# Altium PCB MDES_V3.PcbDoc (part 2 of 2)
Units mil, origin at the board's own origin, x right, y up, seen from the top; angles counter-clockwise.
Board outline 6000 x 4000 mil, 6 copper layers (Component Side, Ground Plane (GND), Inner Layer 1, Inner Layer 2, Power Plane (VCC), Solder Side), stack 51.068 mil thick; 209 components, 153 nets, 733 pads, 136 vias.
Unrouted connection lines stored in the file: 303.
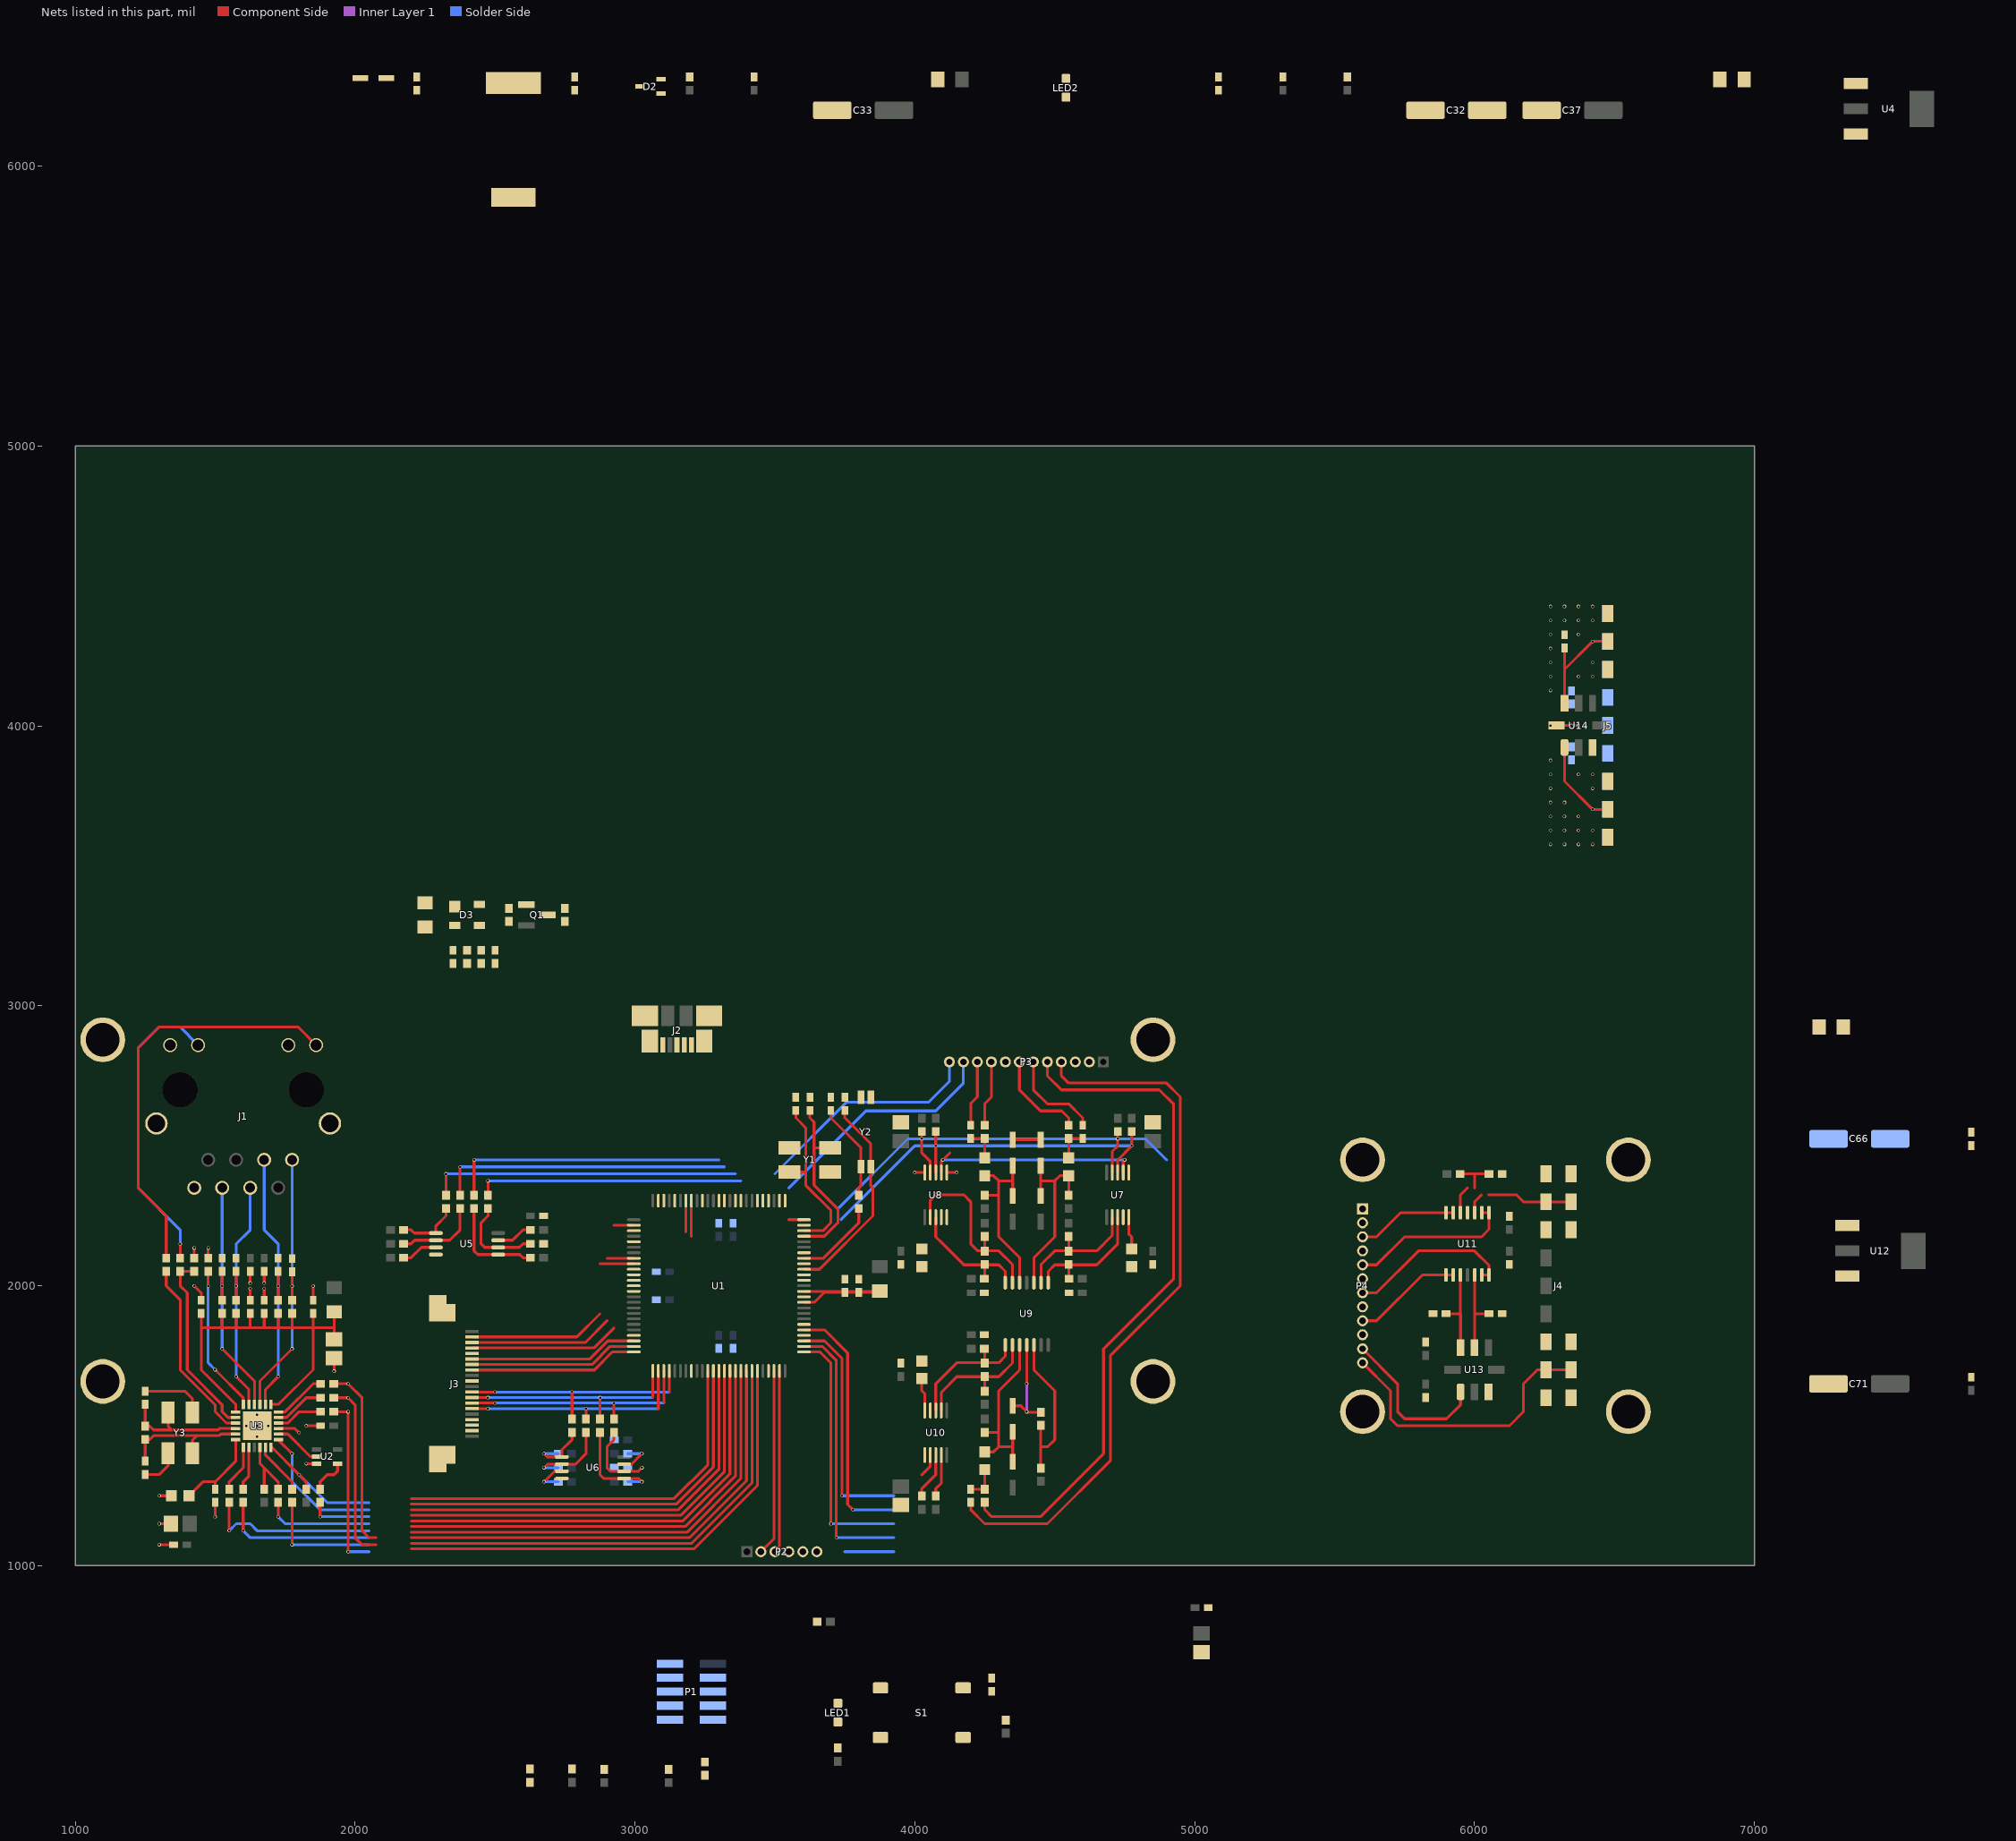
[diagram p5: the nets of this part, all layers, seen from the top]

## Via types
v1: diameter 12, hole 8, Component Side to Solder Side, tented both sides, 98 vias
v2: diameter 12, hole 8, Component Side to Solder Side, 33 vias
v3: diameter 19.68, hole 7.87, Component Side to Solder Side, 5 vias

## Nets (pads, with @x,y where several pads share a name; then routed paths per layer and width w, separated by ;. In a path a pad name is that pad's centre, name@x,y a point inside that pad or via, vN(x,y) a via of type N, cw(c..) or ccw(c..) an arc to the next point about the centre after c; other vN are vias at no path point) (continued)
AGND: C65.2 C66.2 C67.2 C68.2 C69.2 C70.2 C71.2 C72.2 C74.2 C76.2 H5.0 H6.0 H7.0 H8.0 J4.1 J4.3 J4.4 J4.6 J4.7 J4.9 J4.13 J4.15 P4.2 P4.4 P4.6 P4.8 P4.10 R79.2 U11.11 U12.1 U13.3
AI_0: P3.9 R60.1 | length 236.2
  Component Side w10: R60.1@4250,2573.62 4250,2650 4273.62,2673.62 P3.9@4273.62,2800
AI_1: P3.7 R59.1 | length 344.2
  Component Side w10: P3.7@4373.62,2800 4373.62,2700 4448.62,2625 4525,2625 4550,2600 R59.1@4550,2573.62
AI_2: P3.5 R71.1 | length 2449.7
  Component Side w10: R71.1@4250,1226.38 4250,1200 4275,1175 4448.62,1175 4674.31,1400.69 4674.31,1774.31 4925,2025 4925,2648.62 4873.62,2700 4523.62,2700 4473.62,2750 P3.5@4473.62,2800
AI_3: P3.3
AOUT: U1.6
B_5V_S: C73.1 C75.1 J5.10 J5.11 J5.12 U14.8 | length 100
  Component Side w10: v1(6271.81,4002.13) v1(6371.81,4002.13)
  other v1: 6346.81,4002.13
B_AGND: C73.2 C75.2 C77.2 J5.1 J5.3 J5.4 J5.6 J5.7 J5.9 J5.13 J5.15 U14.3
  other v1: 6271.81,3577.13 6321.81,3577.13 6371.81,3577.13 6421.81,3577.13 6271.81,3627.13 6321.81,3627.13 6371.81,3627.13 6421.81,3627.13 6271.81,3677.13 6321.81,3677.13 6371.81,3677.13 6271.81,3727.13 6321.81,3727.13 6271.81,3777.13 6421.81,3777.13 6271.81,3827.13 6371.81,3827.13 6421.81,3827.13 6271.81,3877.13 6271.81,4127.13 6271.81,4177.13 6371.81,4177.13 6421.81,4177.13 6271.81,4227.13 6421.81,4227.13 6271.81,4277.13 6271.81,4327.13 6371.81,4327.13 6271.81,4377.13 6321.81,4377.13 6371.81,4377.13 6421.81,4377.13 6271.81,4427.13 6321.81,4427.13 6371.81,4427.13 6421.81,4427.13
B_Z_OUT: C77.1 J5.5 J5.8 U14.7 | length 449.1
  Component Side w10: U14.7@6321.81,4080.87 C77.1@6321.81,4278.5 ; 6321.81,4202.13 v1(6421.81,4302.13) J5.5@6476.81,4302.13
  Solder Side w10: v1(6421.81,4302.13) J5.8@6476.81,4302.13
B_Z_ST: J5.2 J5.14 U14.1 | length 372.7
  Component Side w10: U14.1@6321.81,3923.39 6321.81,3802.13 v1(6421.81,3702.13) J5.2@6476.81,3702.13
  Solder Side w10: v1(6421.81,3702.13) J5.14@6476.81,3702.13
BZ_PWM: J3.19 U1.26
C_XY_ST: P3.11 U1.43 | length 982.3
  Component Side w10: 3201.57,2176.57 U1.43@3201.57,2304.13
  Solder Side w10: 3550,2350 3825,2625 4075,2625 4173.62,2723.62 P3.11@4173.62,2800
C_Z_ST: P3.12 U1.44 | length 941.2
  Component Side w10: 3181.89,2193.11 U1.44@3181.89,2304.13
  Solder Side w10: 3500,2400 3756.6,2656.6 4050,2656.6 4123.62,2730.22 P3.12@4123.62,2800
EARTH: J1.13 J1.14
ENET-CRS: R8.1 U1.92 | length 2068.7
  Component Side w10: v1(1775,1075) R8.1@1775,1226.38 ; 2200,1120 3187.03,1120 3378.74,1311.71 U1.92@3378.74,1695.87
  Solder Side w10: v1(1775,1075) 2050,1075
ENET-MDC: U1.87 U3.13 | length 1965.8
  Component Side w10: U3.13@1726.77,1450.79 1726.77,1448.23 v1(1775,1400) ; 2200,1220 3147.84,1220 3280.32,1352.48 U1.87@3280.32,1695.87
  Solder Side w10: v1(1775,1400) 1775,1300 1875,1200 2050,1200
ENET-MDIO: R11.2 U1.86 U3.12 | length 1940.5
  Component Side w10: U3.12@1699.21,1423.23 1701.77,1423.23 v1(1800,1325) 1825,1300 R11.2@1825,1273.62 ; 2200,1240 3140,1240 3260.63,1360.63 U1.86@3260.63,1695.87
  Solder Side w10: v1(1800,1325) 1900,1225 2050,1225
ENET-REF_CLK: R10.1 U1.88 | length 1737.7
  Component Side w10: v2(1875,1175) R10.1@1875,1226.38 ; 2200,1200 3155.68,1200 3300,1344.32 U1.88@3300,1695.87
  Solder Side w10: v2(1875,1175) 2050,1175
ENET-RX_ER: R9.1 U1.89 | length 1930.8
  Component Side w10: v2(1725,1175) R9.1@1725,1226.38 ; 2200,1180 3163.52,1180 3319.69,1336.17 U1.89@3319.69,1695.87
  Solder Side w10: v2(1725,1175) 1750,1150 2050,1150
ENET-RXD0: R6.1 U1.91 | length 2171.3
  Component Side w10: v1(1600,1125) R6.1@1600,1226.38 ; 2200,1140 3179.19,1140 3359.06,1319.86 U1.91@3359.06,1695.87
  Solder Side w10: v1(1600,1125) 1625,1100 2050,1100
ENET-RXD1: R7.1 U1.90 | length 2198.9
  Component Side w10: v1(1550,1125) R7.1@1550,1226.38 ; 2200,1160 3171.36,1160 3339.37,1328.01 U1.90@3339.37,1695.87
  Solder Side w10: v1(1550,1125) 1575,1150 1625,1150 1650,1125 2050,1125
ENET-TX_EN: R5.1 U1.93 | length 2301.4
  Component Side w10: R5.1@1923.62,1550 v2(1975,1550) v1(1975,1050) ; 2200,1100 3194.87,1100 3398.43,1303.55 U1.93@3398.43,1695.87
  Solder Side w10: v1(1975,1050) 2050,1050
ENET-TXD0: R3.1 U1.95 | length 2387.6
  Component Side w10: R3.1@1923.62,1600 v2(1975,1600) 2000,1575 2000,1100 2025,1075 2075,1075 ; 2200,1060 3210.55,1060 3437.8,1287.25 U1.95@3437.8,1695.87
ENET-TXD1: R4.1 U1.94 | length 2365.2
  Component Side w10: R4.1@1923.62,1650 v2(1975,1650) 2025,1600 2025,1125 2050,1100 2075,1100 ; 2200,1080 3202.71,1080 3418.11,1295.4 U1.94@3418.11,1695.87
EXT_VBAT: D1.1 D2.2
GND: C1.2 C2.2 C3.2 C4.2 C5.2 C6.2 C7.2 C8.2 C9.2 C10.2 C11.2 C12.2 C13.2 C14.2 C15.2 C16.2 C17.2 C18.2 C19.2 C20.2 C21.2 C22.2 C23.2 C24.2 C25.2 C26.2 C27.2 C28.2 C29.2 C30.2 C31.2 C32.2 C33.2 C34.2 C35.2 C36.2 C37.2 C38.2 C39.2 C40.2 C41.2 C42.2 C43.2 C44.2 C45.2 C46.2 C47.2 C48.2 C51.2 C52.2 C53.2 C54.2 C55.2 C56.2 C57.2 C58.2 C59.2 C60.2 C62.2 C63.2 C64.2 D1.2 D3.1 D5.2 D7.2 D9.2 H1.0 H2.0 H3.0 H4.0 J1.8 J1.10 J1.12 J2.5 J3.5 J3.10 J3.17 J3.21 J3.22 L5.1 LED2.K P1.3 P1.5 P1.9 P2.6 P3.2 P3.4 P3.6 P3.8 P3.10 R13.2 R15.2 R23.2 R39.2 R40.2 R73.2 S1.1 U1.11 U1.15 U1.31 U1.41 U1.55 U1.72 U1.83 U1.97 U2.3 U3.25 U4.1 U5.4 U6.4 U7.4 U7.6 U8.4 U8.6 U8.10 U9.11 U10.4 U10.6 Y1.2 Y1.4 Y2.2 Y2.3 Y3.2 Y3.4 | length 4691
  Component Side w10: C15.2@1250,1326.38 1301.38,1326.38 1331.69,1356.69 Y3.4@1331.69,1402.17 ; C18.2@1250,1623.62 1391.38,1623.62 1418.31,1596.69 Y3.2@1418.31,1547.83 ; v2(1300,1075) C17.2@1351.38,1075 ; v2(1300,1150) C14.2@1341.54,1150 ; v2(1300,1250) C20.2@1343.5,1250 ; v2(1425,2000) 1450,1975 C21.2@1450,1948.62 ; R13.2@1425,2098.62 v2(1425,2135) ; R15.2@1475,2098.62 v2(1475,2135) ; v2(1500,1175) C22.2@1500,1226.38 ; C23.2@1625,1948.62 v2(1625,1990) ; v2(1625,2010) C30.2@1625,2051.38 ; C28.2@1675,1948.62 v2(1675,1990) ; v2(1675,2010) C29.2@1675,2051.38 ; v2(1825,1364.41) U2.3@1862.6,1364.41 ; v2(1825,1500) C13.2@1876.38,1500 ; C19.2@1850,1948.62 v2(1850,2000) ; v2(1925,1695) C16.2@1925,1741.54 ; v1(4000,2404.72) U8.10@4035.63,2404.72 ; U8.6@4114.37,2404.72 v1(4150,2404.72) ; C60.2@4200,1226.38 4200,1200 4250,1150 4473.62,1150 4698.62,1375 4698.62,1750 4948.62,2000 4948.62,2675 4898.62,2725 4548.62,2725 4523.62,2750 P3.4@4523.62,2800 ; C48.2@4200,2573.62 4200,2651.38 4223.62,2675 P3.10@4223.62,2800 ; D9.2@4350,1571.26 4378.74,1571.26 v1(4400,1550) 4401.38,1548.62 R73.2@4450,1548.62 ; D7.2@4350,2521.26 D5.2@4450,2521.26 ; v1(4400,1650) U9.11@4400,1788.78 ; P3.6@4423.62,2800 4423.62,2700 4473.62,2650 4550,2650 4600,2600 C47.2@4600,2573.62
  Inner Layer 1 w10: v1(4400,1550) v1(4400,1650)
  other v3: 1650,1460.63 1610.63,1500 1650,1500 1689.37,1500 1650,1539.37
I2C0_SCL: R55.2 R56.2 R69.2 U1.24 U7.9 U8.9 U10.9 | length 1753.4
  Component Side w10: R56.2@4025,2551.38 4025,2475 4055.31,2444.69 U8.9@4055.31,2404.72 ; R69.2@4075,1248.62 4075,1275 4094.69,1294.69 U10.9@4094.69,1370.28 ; U7.9@4705.31,2404.72 4705.31,2480.31 4725,2500 R55.2@4725,2551.38
  Solder Side w10: 3725,2275 3975,2525 v1(4025,2525) v1(4725,2525) 4825,2525 4900,2450
I2C0_SDA: R57.2 R58.2 R70.2 U1.25 U7.8 U8.8 U10.8 | length 1658.6
  Component Side w10: 3550,2236.22 U1.25@3604.13,2236.22 ; R70.2@4025,1248.62 4025,1275 4075,1325 U10.8@4075,1370.28 ; U8.8@4075,2404.72 R58.2@4075,2551.38 ; U7.8@4725,2404.72 4725,2450 v1(4775,2500) R57.2@4775,2551.38
  Solder Side w10: 3736.22,2236.22 4000,2500 v1(4075,2500) v1(4775,2500)
I2C1_INT: J3.4 U1.52 | length 608.4
  Component Side w10: J3.4@2417.32,1777.95 2852.95,1777.95 2925,1850 ; 2925,2216.54 U1.52@2995.87,2216.54
I2C1_SCL: J3.3 U1.58 | length 610.6
  Component Side w10: J3.3@2417.32,1797.64 2822.64,1797.64 2900,1875 ; 2900,2098.43 U1.58@2995.87,2098.43
I2C1_SDA: J3.2 U1.59 | length 612.8
  Component Side w10: J3.2@2417.32,1817.32 2792.32,1817.32 2875,1900 ; 2875,2078.74 U1.59@2995.87,2078.74
I2C2_SCL: U1.49
I2C2_SDA: U1.48
ISP_EN: P1.7 P2.5 U1.53
JTAG_TCLK_SWCLK: P1.4 R23.1 U1.5 | length 904.1
  Component Side w10: U1.5@3604.13,1842.52 3677.48,1842.52 3760,1760 3760,1218.74 v1(3778.74,1200)
  Solder Side w10: v1(3778.74,1200) 3925,1200
JTAG_TDI: P1.8 R25.2 U1.2 | length 974.9
  Component Side w10: U1.2@3604.13,1783.46 3669.37,1783.46 3719.68,1733.15 v1(3719.68,1100)
  Solder Side w10: v1(3719.68,1100) 3925,1100
JTAG_TDO_SWO: P1.6 R24.2 U1.1 | length 911.9
  Component Side w10: U1.1@3604.13,1763.78 3661.22,1763.78 3700,1725 v1(3700,1150)
  Solder Side w10: v1(3700,1150) 3925,1150
JTAG_TMS_SWDIO: P1.2 R22.2 U1.3 | length 837.8
  Component Side w10: U1.3@3604.13,1803.15 3677.53,1803.15 3739.37,1741.31 v1(3739.37,1250)
  Solder Side w10: v1(3739.37,1250) 3925,1250
JTAG_TRST: R1.1 U1.4
LCD_BL_PWM: J3.18 U1.27
LCD_EN: J3.6 U1.73 | length 605.3
  Component Side w10: J3.6@2417.32,1738.58 2838.58,1738.58 2903.15,1803.15 U1.73@2995.87,1803.15
LCD_RS: J3.8 U1.75 | length 605.3
  Component Side w10: J3.8@2417.32,1699.21 2854.89,1699.21 2919.46,1763.78 U1.75@2995.87,1763.78
LCD_WR: J3.7 U1.74 | length 605.3
  Component Side w10: J3.7@2417.32,1718.9 2846.74,1718.9 2911.3,1783.46 U1.74@2995.87,1783.46
NetC7_1: C7.1 C8.1 L1.2 U1.10 U1.12 | length 549.7
  Component Side w10: U1.10@3604.13,1940.94 3640.94,1940.94 3676.38,1976.38 C8.1@3750,1976.38 C7.1@3800,1976.38 3826.38,1976.38 L1.2@3869.69,1976.38 ; U1.12@3604.13,1980.31 3830.31,1980.31 L1.2@3873.62,1980.31
NetC11_1: C11.1 R2.2 Y2.4 | length 350.2
  Component Side w10: C11.1@3700,2626.38 3700,2600 3807.28,2492.72 3807.28,2357.28 3800,2350 R2.2@3800,2323.62
NetC15_1: C15.1 R14.1 U3.5 Y3.1 | length 478.6
  Component Side w10: C15.1@1250,1373.62 R14.1@1250,1451.38 1266.38,1451.38 1280,1465 1515,1465 1520.47,1470.47 U3.5@1573.23,1470.47 ; Y3.1@1418.31,1402.17 1418.31,1448.31 1435,1465
NetC16_1: C16.1 C19.1 C21.1 C23.1 C28.1 L2.2 R16.1 R17.1 R18.1 R19.1 U3.1 U3.19 | length 1687.9
  Component Side w10: C21.1@1450,1901.38 1450,1850 ; 1525,1850 R17.1@1525,1901.38 ; U3.1@1573.23,1549.21 1573.23,1576.77 1450,1700 1450,1850 ; 1575,1850 R16.1@1575,1901.38 ; C23.1@1625,1901.38 1625,1850 ; C28.1@1675,1901.38 1675,1850 ; U3.19@1699.21,1576.77 1726.77,1576.77 1850,1700 1850,1850 ; 1725,1850 R19.1@1725,1901.38 ; 1775,1850 R18.1@1775,1901.38 ; C19.1@1850,1901.38 1850,1850 ; C16.1@1925,1808.46 1925,1850 ; L2.2@1925,1906.69 1925,1850 ; 1450,1850 1625,1850 ; 1625,1850 1675,1850 ; 1675,1850 1850,1850 ; 1850,1850 1925,1850
NetC18_1: C18.1 R14.2 U3.4 Y3.3 | length 477.1
  Component Side w10: C18.1@1250,1576.38 R14.2@1250,1498.62 1266.38,1498.62 1280,1485 1510,1485 1515.16,1490.16 U3.4@1573.23,1490.16 ; Y3.3@1331.69,1547.83 1331.69,1498.31 1345,1485
NetC20_1: C20.1 C22.1 U3.6 | length 321.7
  Component Side w10: C20.1@1406.5,1250 1456.5,1300 1500,1300 ; C22.1@1500,1273.62 1500,1300 ; U3.6@1573.23,1450.79 1573.23,1373.23 1500,1300
NetC24_1: C24.1 J1.4 R16.2 U3.23 | length 915.5
  Component Side w10: v2(1575,1675) 1620.47,1629.53 U3.23@1620.47,1576.77 ; R16.2@1575,1948.62 C24.1@1575,2051.38
  Solder Side w10: v2(1575,1675) 1575,2150 1625,2200 J1.4@1625,2350
  other v2: 1575,2000
NetC25_1: C25.1 J1.6 R17.2 U3.22 | length 923.7
  Component Side w10: v2(1525,1775) 1640.16,1659.84 U3.22@1640.16,1576.77 ; R17.2@1525,1948.62 C25.1@1525,2051.38
  Solder Side w10: v2(1525,1775) v2(1525,2000) J1.6@1525,2350
NetC26_1: C26.1 J1.1 R18.2 U3.21 | length 1023.7
  Component Side w10: U3.21@1659.84,1576.77 1659.84,1659.84 v2(1775,1775) ; R18.2@1775,1948.62 C26.1@1775,2051.38
  Solder Side w10: v2(1775,1775) v2(1775,2000) J1.1@1775,2450
NetC27_1: C27.1 J1.3 R19.2 U3.20 | length 1015.5
  Component Side w10: U3.20@1679.53,1576.77 1679.53,1629.53 v2(1725,1675) ; R19.2@1725,1948.62 C27.1@1725,2051.38
  Solder Side w10: J1.3@1675,2450 1675,2200 1725,2150 v2(1725,1675)
  other v2: 1725,2000
NetC32_1: C32.1 C34.1 L4.2 U4.3
NetC45_1: C45.1 U7.5 | length 118.2
  Component Side w10: U7.5@4764.37,2245.28 4764.37,2185.63 4775,2175 C45.1@4775,2131.5
NetC46_1: C46.1 U8.5
NetC47_1: C47.1 C49.1 R59.2 | length 119.9
  Component Side w10: C49.1@4550,2456.5 R59.2@4550,2526.38 C47.1@4600,2526.38
NetC48_1: C48.1 C50.1 R60.2 | length 119.9
  Component Side w10: C48.1@4200,2526.38 R60.2@4250,2526.38 C50.1@4250,2456.5
NetC49_2: C49.2 D4.2 D5.1 R61.1 U9.3 | length 679.6
  Component Side w10: U9.3@4425.59,2011.22 4425.59,2100.59 4500,2175 4500,2375 ; D4.2@4450,2321.26 4450,2375 ; D5.1@4450,2428.74 4450,2375 ; R61.1@4550,2323.62 C49.2@4550,2393.5 4518.5,2393.5 4500,2375 ; 4450,2375 4500,2375
NetC50_2: C50.2 D6.2 D7.1 R62.1 U9.5 | length 633.4
  Component Side w10: R62.1@4250,2323.62 4298.62,2323.62 ; C50.2@4250,2393.5 4281.5,2393.5 4300,2375 ; D6.2@4350,2321.26 4350,2375 ; D7.1@4350,2403.74 4350,2375 ; U9.5@4374.41,2011.22 4374.41,2100.59 4300,2175 4300,2375 ; 4300,2375 4350,2375
NetC59_1: C59.1 U10.5 | length 118.2
  Component Side w10: C59.1@4025,1668.5 4025,1625 4035.63,1614.37 U10.5@4035.63,1554.72
NetC60_1: C60.1 C61.1 R71.2 | length 119.9
  Component Side w10: C60.1@4200,1273.62 R71.2@4250,1273.62 C61.1@4250,1343.5
NetC61_2: C61.2 D8.2 D9.1 R74.1 U9.10 | length 658.4
  Component Side w10: C61.2@4250,1406.5 4281.5,1406.5 4300,1425 ; R74.1@4250,1476.38 4298.62,1476.38 ; D8.2@4350,1371.26 4350,1425 ; D9.1@4350,1478.74 4350,1425 ; U9.10@4374.41,1788.78 4374.41,1699.41 4300,1625 4300,1425 ; 4300,1425 4350,1425
NetC66_1: C66.1 C68.1 L6.2 U12.3
NetD2_1: D2.1 R29.2
NetD3_2: D3.2 J2.2 R52.2
NetD3_3: D3.3 J2.3 R53.2 R54.2
NetJ1_9: J1.9 R20.2 | length 1486.8
  Component Side w10: R20.2@1325,2098.62 1325,2250 1225,2350 1225,2850 1300,2925 1796,2925 J1.9@1861,2860
NetJ1_11: J1.11 R21.2 | length 1085.5
  Component Side w10: R21.2@1375,2098.62 v1(1375,2150)
  Solder Side w10: v1(1375,2150) 1375,2200 1225,2350 1225,2850 1300,2925 1374,2925 J1.11@1439,2860
NetJ2_MH1: J2.MH1 J2.MH2 J2.MH3 J2.MH4 L5.2
NetLED1_A: LED1.A R28.2
NetLED2_A: LED2.A R30.2
NetQ1_1: Q1.1 R51.2
NetQ1_3: Q1.3 R54.1
NetR3_2: R3.2 U3.17 | length 185.2
  Component Side w10: U3.17@1726.77,1529.53 1754.53,1529.53 1825,1600 R3.2@1876.38,1600 R3.2@1871.85,1604.53
NetR4_2: R4.2 U3.18 | length 191.4
  Component Side w10: U3.18@1726.77,1549.21 1749.21,1549.21 1850,1650 R4.2@1876.38,1650
NetR5_2: R5.2 U3.16 | length 166.2
  Component Side w10: U3.16@1726.77,1509.84 1759.84,1509.84 1800,1550 R5.2@1876.38,1550
NetR6_2: R6.2 U3.8 | length 158.1
  Component Side w10: R6.2@1600,1273.62 1600,1300 1620.47,1320.47 U3.8@1620.47,1423.23
NetR7_2: R7.2 U3.7 | length 170.6
  Component Side w10: R7.2@1550,1273.62 1550,1300 1600.79,1350.79 U3.7@1600.79,1423.23
NetR8_2: R8.2 U3.11 | length 189.2
  Component Side w10: U3.11@1679.53,1423.23 1679.53,1395.47 1775,1300 R8.2@1775,1273.62
NetR9_2: R9.2 R12.2 U3.10 | length 253
  Component Side w10: U3.10@1659.84,1423.23 1659.84,1365.16 1675,1350 ; R12.2@1675,1273.62 1675,1350 ; R9.2@1725,1273.62 1725,1300 1675,1350
NetR10_2: R10.2 U2.4 | length 131.3
  Component Side w10: R10.2@1875,1273.62 1875,1300 1900,1325 1925,1325 1937.4,1337.4 U2.4@1937.4,1364.41
NetR13_1: R13.1 R21.1 U3.2 | length 670.2
  Component Side w10: R13.1@1425,2051.38 R21.1@1375,2051.38 1375,2000 1400,1975 1400,1700 1525,1575 1525,1550 1545.47,1529.53 U3.2@1573.23,1529.53
NetR15_1: R15.1 U3.24 | length 526.7
  Component Side w10: v2(1475,2000) R15.1@1475,2051.38 ; v2(1500,1700) 1600,1600 1600,1577.56 U3.24@1600.79,1576.77
  Solder Side w10: v2(1475,2000) 1475,1725 v2(1500,1700)
NetR20_1: R20.1 U3.3 | length 663.7
  Component Side w10: R20.1@1325,2051.38 1325,2000 1375,1950 1375,1700 1500,1575 1500,1550 1540.16,1509.84 U3.3@1573.23,1509.84
NetR26_1: R26.1 S1.2
NetR31_2: R31.2 R39.1 U5.6 | length 323.7
  Component Side w10: R31.2@2475,2276.38 2475,2250 2450,2225 2450,2150 2462.8,2137.2 U5.6@2511.22,2137.2 2587.2,2137.2 2600,2150 R39.1@2626.38,2150
NetR32_2: R32.2 R41.2 U5.5 | length 363.1
  Component Side w10: R32.2@2425,2276.38 2425,2125 2438.39,2111.61 U5.5@2511.22,2111.61 2588.39,2111.61 2600,2100 R41.2@2626.38,2100
NetR33_2: R33.2 R43.2 U5.2 | length 298.5
  Component Side w10: R43.2@2173.62,2150 2200,2150 2212.8,2162.8 U5.2@2288.78,2162.8 2337.8,2162.8 2375,2200 R33.2@2375,2276.38
NetR34_2: R34.2 R45.2 U5.1 | length 223
  Component Side w10: R45.2@2173.62,2200 2200,2200 2211.61,2188.39 U5.1@2288.78,2188.39 2288.78,2213.78 2325,2250 R34.2@2325,2276.38
NetR35_2: R35.2 R40.1 U6.6 | length 272.3
  Component Side w10: R35.2@2925,1476.38 2925,1450 2900,1425 2900,1350 2912.8,1337.2 U6.6@2961.22,1337.2 3012.2,1337.2 v1(3025,1350)
NetR36_2: R36.2 R42.2 U6.5 | length 363.1
  Component Side w10: R36.2@2875,1476.38 2875,1325 2888.39,1311.61 U6.5@2961.22,1311.61 3013.39,1311.61 v1(3025,1300)
  Solder Side w10: R42.2@2973.62,1300 v1(3025,1300)
NetR37_2: R37.2 R44.2 U6.2 | length 298.5
  Component Side w10: v1(2675,1350) 2687.8,1362.8 U6.2@2738.78,1362.8 2787.8,1362.8 2825,1400 R37.2@2825,1476.38
  Solder Side w10: v1(2675,1350) R44.2@2726.38,1350
NetR38_2: R38.2 R46.2 U6.1 | length 223
  Component Side w10: v1(2675,1400) 2686.61,1388.39 U6.1@2738.78,1388.39 2738.78,1413.78 2775,1450 R38.2@2775,1476.38
  Solder Side w10: v1(2675,1400) R46.2@2726.38,1400
NetR47_2: R47.2 U5.7 | length 130.6
  Component Side w10: U5.7@2511.22,2162.8 2562.8,2162.8 2600,2200 R47.2@2626.38,2200
NetR48_2: R48.2 U6.7 | length 130.6
  Component Side w10: U6.7@2961.22,1362.8 2987.8,1362.8 v1(3025,1400)
  Solder Side w10: R48.2@2973.62,1400 v1(3025,1400)
NetR49_2: R49.2 U5.3 | length 130.6
  Component Side w10: R49.2@2173.62,2100 2200,2100 2237.2,2137.2 U5.3@2288.78,2137.2
NetR50_2: R50.2 U6.3 | length 130.6
  Component Side w10: v1(2675,1300) 2712.2,1337.2 U6.3@2738.78,1337.2
  Solder Side w10: v1(2675,1300) R50.2@2726.38,1300
NetR63_2: R63.2 R65.1 U7.2 U9.2 | length 477.2
  Component Side w10: U9.2@4451.18,2011.22 4451.18,2076.18 4500,2125 R65.1@4550,2125 ; R63.2@4550,2175 R65.1@4550,2125 ; U7.2@4705.31,2245.28 4705.31,2180.31 4650,2125 R65.1@4550,2125
NetR64_2: R64.2 R66.1 U8.2 U9.6 | length 670.3
  Component Side w10: U8.2@4055.31,2245.28 4055.31,2305.31 4075,2325 4175,2325 4200,2300 4200,2150 4225,2125 R66.1@4250,2125 ; R66.1@4250,2123.62 R66.1@4250,2125 ; R64.2@4250,2176.38 R66.1@4250,2125 ; U9.6@4348.82,2011.22 4348.82,2076.18 4300,2125 R66.1@4250,2125
NetR65_2: R65.2 R67.1 U7.3 U9.1 | length 474.7
  Component Side w10: U9.1@4476.77,2011.22 4476.77,2051.77 4500,2075 R65.2@4550,2075 ; R67.1@4550,2026.38 R65.2@4550,2075 ; R65.2@4550,2076.38 R65.2@4550,2075 ; U7.3@4725,2245.28 4725,2150 4650,2075 R65.2@4550,2075
NetR66_2: R66.2 R68.1 U8.3 U9.7 | length 460.1
  Component Side w10: U8.3@4075,2245.28 4075,2175 4100,2150 4175,2075 R66.2@4250,2075 ; R68.1@4250,2026.38 R66.2@4250,2075 ; R66.2@4250,2076.38 R66.2@4250,2075 ; U9.7@4323.23,2011.22 4323.23,2051.77 4300,2075 R66.2@4250,2075
NetR72_2: R72.2 R73.1 U9.12 | length 582.7
  Component Side w10: U9.12@4425.59,1788.78 4425.59,1699.41 4500,1625 4500,1450 4475,1425 4450,1425 ; R72.2@4450,1348.62 4450,1425 ; R73.1@4450,1501.38 4450,1425
NetR75_2: R75.2 R76.1 U9.9 U10.2 | length 479.9
  Component Side w10: U10.2@4094.69,1554.72 4094.69,1619.69 4150,1675 R76.1@4250,1675 ; R75.2@4250,1623.62 R76.1@4250,1675 ; R76.1@4250,1676.38 R76.1@4250,1675 ; U9.9@4348.82,1788.78 4348.82,1723.82 4300,1675 R76.1@4250,1675
NetR76_2: R76.2 R77.1 U9.8 U10.3 | length 474.7
  Component Side w10: U10.3@4075,1554.72 4075,1650 4150,1725 R76.2@4250,1725 ; R76.2@4250,1723.62 R76.2@4250,1725 ; R77.1@4250,1773.62 R76.2@4250,1725 ; U9.8@4323.23,1788.78 4323.23,1748.23 4300,1725 R76.2@4250,1725
NetR78_2: R78.2 R79.1 U11.12 | length 252.1
  Component Side w10: R78.2@5948.62,2400 6000,2400 ; U11.12@5949.41,2261.22 5949.41,2324.41 5975,2350 ; 6000,2350 6000,2400 ; R79.1@6051.38,2400 6000,2400
NetU2_2: U2.2 U3.14 | length 169.2
  Component Side w10: U3.14@1726.77,1470.47 1759.53,1470.47 1840,1390 U2.2@1862.6,1390
P0_0: U1.46
RESET: C31.1 P1.10 P2.4 R26.2 R27.2 U1.17 U3.15 | length 254.5
  Component Side w10: U3.15@1726.77,1490.16 1784.84,1490.16 v2(1800,1475)
  Solder Side w10: 3750,1050 3925,1050
RESET_OUT: LED1.K U1.14 U7.7 U8.7 U10.7 | length 863.1
  Component Side w10: 4025,1325 4055.32,1355.32 U10.7@4055.32,1395.28 ; U8.7@4094.68,2404.72 4094.68,2444.68 v1(4100,2450) 4125,2475 ; U7.7@4744.69,2404.72 4744.69,2444.68 v1(4750,2450)
  Solder Side w10: v1(4100,2450) v1(4750,2450)
RTCX1: C12.1 U1.16 Y2.1 | length 742.8
  Component Side w10: U1.16@3604.13,2059.06 3659.06,2059.06 3850,2250 3850,2350 3842.72,2357.28 3842.72,2507.28 3750,2600 C12.1@3750,2626.38
RTCX2: R2.1 U1.18 | length 299.7
  Component Side w10: U1.18@3604.13,2098.43 3673.43,2098.43 3800,2225 R2.1@3800,2276.38
SPI_MISO: U1.61
SPI_MOSI: U1.60
SPI_SCK: U1.62
SPI_SSEL: U1.63
SSP0_MISO: R33.1 U1.37 | length 1046.1
  Component Side w10: R33.1@2375,2323.62 v1(2375,2425)
  Solder Side w10: v1(2375,2425) 3319.69,2425
SSP0_MOSI: R32.1 U1.38 | length 1001.4
  Component Side w10: R32.1@2425,2323.62 v1(2425,2450)
  Solder Side w10: v1(2425,2450) 3300,2450
SSP0_SCK: R31.1 U1.34 | length 955.1
  Component Side w10: R31.1@2475,2323.62 v1(2475,2375)
  Solder Side w10: v1(2475,2375) 3378.74,2375
SSP0_SSEL: R34.1 U1.35 | length 1110.4
  Component Side w10: R34.1@2325,2323.62 v1(2325,2400)
  Solder Side w10: v1(2325,2400) 3359.06,2400
SSP1_MISO: J3.15 R37.1 U1.77 | length 838.4
  Component Side w10: J3.15@2417.32,1561.42 v1(2475,1561.42) ; R37.1@2825,1523.62 v1(2825,1561.42) ; 3083.46,1561.42 U1.77@3083.46,1695.87
  Solder Side w10: v1(2475,1561.42) 3083.46,1561.42
SSP1_MOSI: J3.13 R36.1 U1.76 | length 818.7
  Component Side w10: J3.13@2417.32,1600.79 v1(2475,1600.79) ; R36.1@2875,1523.62 v1(2875,1600.79) ; 3063.78,1600.79 U1.76@3063.78,1695.87
  Solder Side w10: v1(2475,1600.79) 3063.78,1600.79
SSP1_SCK: J3.14 R35.1 U1.78 | length 858.1
  Component Side w10: J3.14@2417.32,1581.1 v1(2500,1581.1) ; R35.1@2925,1523.62 v1(2925,1581.1) ; 3103.15,1581.1 U1.78@3103.15,1695.87
  Solder Side w10: v1(2500,1581.1) 3103.15,1581.1
SSP1_SSEL: J3.12 R38.1 U1.79 | length 877.8
  Component Side w10: J3.12@2417.32,1620.47 v1(2500,1620.47) ; R38.1@2775,1523.62 v1(2775,1620.47) ; 3122.83,1620.47 U1.79@3122.83,1695.87
  Solder Side w10: v1(2500,1620.47) 3122.83,1620.47
UART0_RX: P2.3 U1.99 | length 652.7
  Component Side w10: P2.3@3500,1050 3516.54,1066.54 U1.99@3516.54,1695.87
UART0_TX: P2.2 U1.98 | length 665.3
  Component Side w10: P2.2@3450,1050 3496.85,1096.85 U1.98@3496.85,1695.87
USB2-DM: C44.1 R52.1 U1.30
USB2-DP: C43.1 R53.1 U1.29
USB-CONNECT: R51.1 U1.64
V_BUS_0: D3.4 J2.1 L3.1 L4.1
V_VIB: P4.3 U11.13 U11.14 | length 359.5
  Component Side w10: P4.3@5600,2175 5650,2175 5736.22,2261.22 U11.14@5898.23,2261.22 U11.13@5923.82,2261.22
VBAT: C38.1 C39.1 C40.1 D2.3 U1.19
VIN_S: L6.1 P4.1
X_OUT: C74.1 U11.3 U13.7 | length 311.7
  Component Side w10: C74.1@5898.62,1900 5950,1900 ; U11.3@5949.41,2038.78 5949.41,1900.59 5950,1900 ; U13.7@5950,1778.74 5950,1900
X_VIB: P4.9 U11.1 U11.2 | length 391.7
  Component Side w10: P4.9@5600,1875 5650,1875 5813.78,2038.78 U11.1@5898.23,2038.78 U11.2@5923.82,2038.78
XTAL1: C10.1 U1.22 Y1.3 | length 641.3
  Component Side w10: U1.22@3604.13,2177.17 3677.17,2177.17 3725,2225 3725,2275 3640,2360 3640,2585 3625,2600 C10.1@3625,2626.38 ; 3640,2493.31 Y1.3@3697.83,2493.31
XTAL2: C9.1 U1.23 Y1.1 | length 618.5
  Component Side w10: Y1.1@3552.17,2406.69 3610,2406.69 ; C9.1@3575,2626.38 3575,2600 3610,2565 3610,2360 3700,2270 3700,2225 3671.85,2196.85 U1.23@3604.13,2196.85
XY_ST: P4.11 U13.1 | length 579.1
  Component Side w10: P4.11@5600,1775 5725,1650 5725,1550 5750,1525 5900,1525 5950,1575 U13.1@5950,1621.26
Y_OUT: C76.1 U11.5 U13.6 | length 311.4
  Component Side w10: U13.6@6000,1778.74 6000,1900 C76.1@6051.38,1900 ; 6000.59,1900 U11.5@6000.59,2038.78
Y_VIB: P4.7 U11.6 U11.7 | length 595.4
  Component Side w10: P4.7@5600,1975 5650,1975 5800,2125 6000,2125 6051.77,2073.23 U11.7@6051.77,2038.78 U11.6@6026.18,2038.78
Z_OUT: J4.5 J4.8 U11.10 | length 379.2
  Component Side w10: U11.10@6000.59,2261.22 6000.59,2300.59 6025,2325 ; 6050,2325 6150,2325 6175,2300 J4.8@6255,2300 J4.5@6345,2300
Z_ST: J4.2 J4.14 P4.12 | length 1038.2
  Component Side w10: P4.12@5600,1725 5700,1625 5700,1525 5725,1500 6125,1500 6175,1550 6175,1650 6225,1700 J4.14@6255,1700 J4.2@6345,1700
Z_VIB: P4.5 U11.8 U11.9 | length 589.3
  Component Side w10: P4.5@5600,2075 5650,2075 5750,2175 6025,2175 6051.77,2201.77 U11.8@6051.77,2261.22 U11.9@6026.18,2261.22
pads on no net: C32.0 C33.0 C37.0 C66.0 C71.0 J1.7 J1.15 J1.16 J2. J2.4 J3.9 J3.11 J3.16 LED1.0 LED2.0 S1.0 U1.13 U1.32 U1.33 U1.36 U1.39 U1.40 U1.45 U1.47 U1.50 U1.51 U1.56 U1.57 U1.65 U1.66 U1.67 U1.68 U1.69 U1.70 U1.80 U1.81 U1.82 U1.85 U1.100 U2.1 U10.10 U13.2 U13.4 U13.5 U14.2 U14.4 U14.5 U14.6

## Polygon pours and split planes (outlines as drawn)
B_5V_S on Solder Side "B_AGND" (solid, remove dead copper, pour order 4): 6246.81,3977.13 6246.81,4027.13 6321.81,4102.13 6371.81,4102.13 6396.81,4127.13 6496.81,4127.13 6496.81,3877.13 6396.81,3877.13 6371.81,3902.13 6321.81,3902.13
B_AGND on Solder Side "B_AGND" (solid, remove dead copper, pour order 2): 6246.81,3552.13 6246.81,4452.13 6500,4452.13 6500,3552.13
B_AGND on Component Side "B_AGND" (solid, remove dead copper, pour order 6): 6246.81,3552.13 6496.81,3552.13 6496.81,4452.13 6246.81,4452.13 6246.81,3552.13
no net on Ground Plane (GND) (split plane): 6979.9,1020.1 1020.1,1020.1 1020.1,4979.9 6979.9,4979.9
no net on Power Plane (VCC) (split plane): 6979.9,1020.1 1020.1,1020.1 1020.1,4979.9 6979.9,4979.9

## Keep-outs
Keep-Out Layer:
  lines w5: 1000,1000 5000,1000 5000,3050 1000,3050 1000,1000 ; 5500,1450 5500,2550 6650,2550 6650,1450 5500,1450 ; 6246.81,3552.13 6246.81,4452.13 6546.81,4452.13 6546.81,3552.13 6246.81,3552.13

## Other copper
Solder Side:
  rectangle net 3V3: 3200,1900 3400,2100